# Altium PCB KORUZA_PowerModule_v2.PcbDoc
Units mil, origin at the board's own origin, x right, y up, seen from the top; angles counter-clockwise.
Board outline 2025 x 2630 mil, 2 copper layers (Top Layer, Bottom Layer); 13 components, 5 nets, 62 pads, 0 vias.
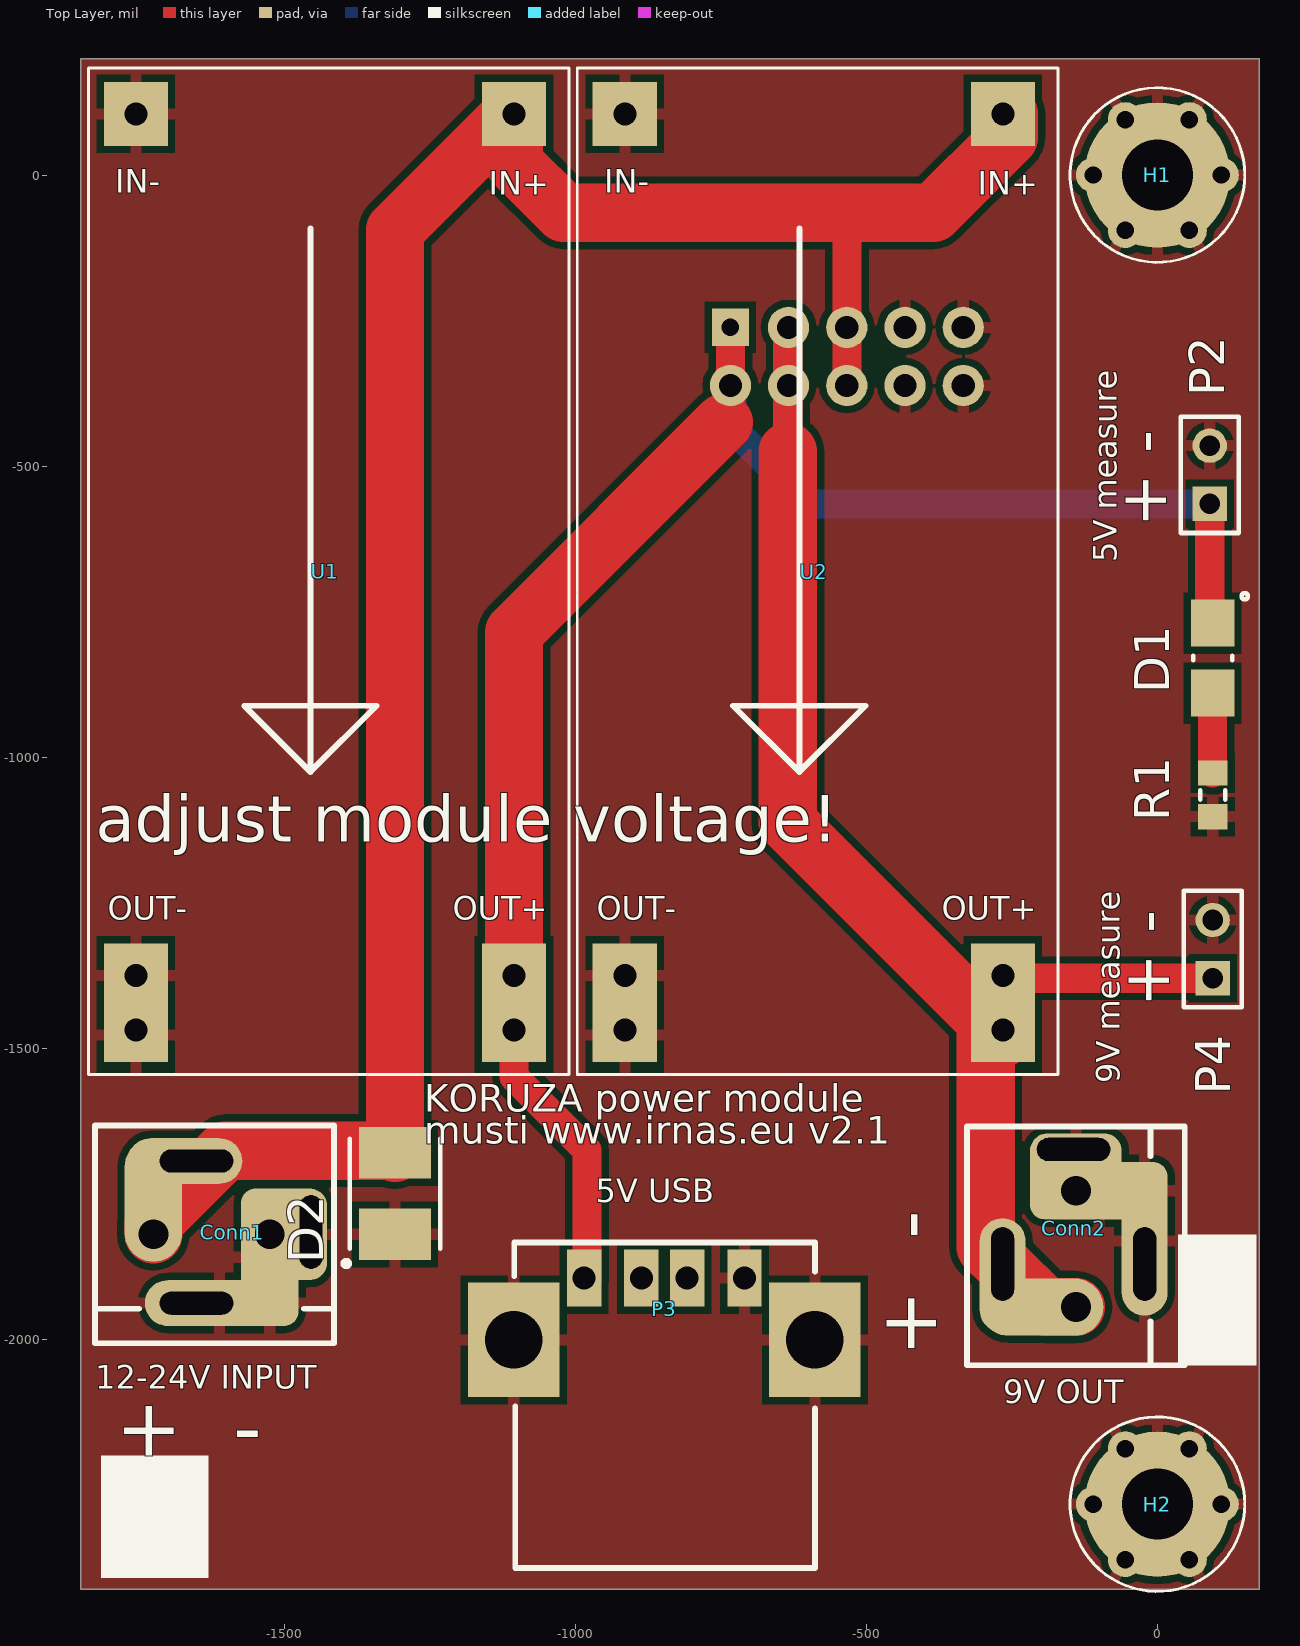
[diagram p0: Top Layer view]
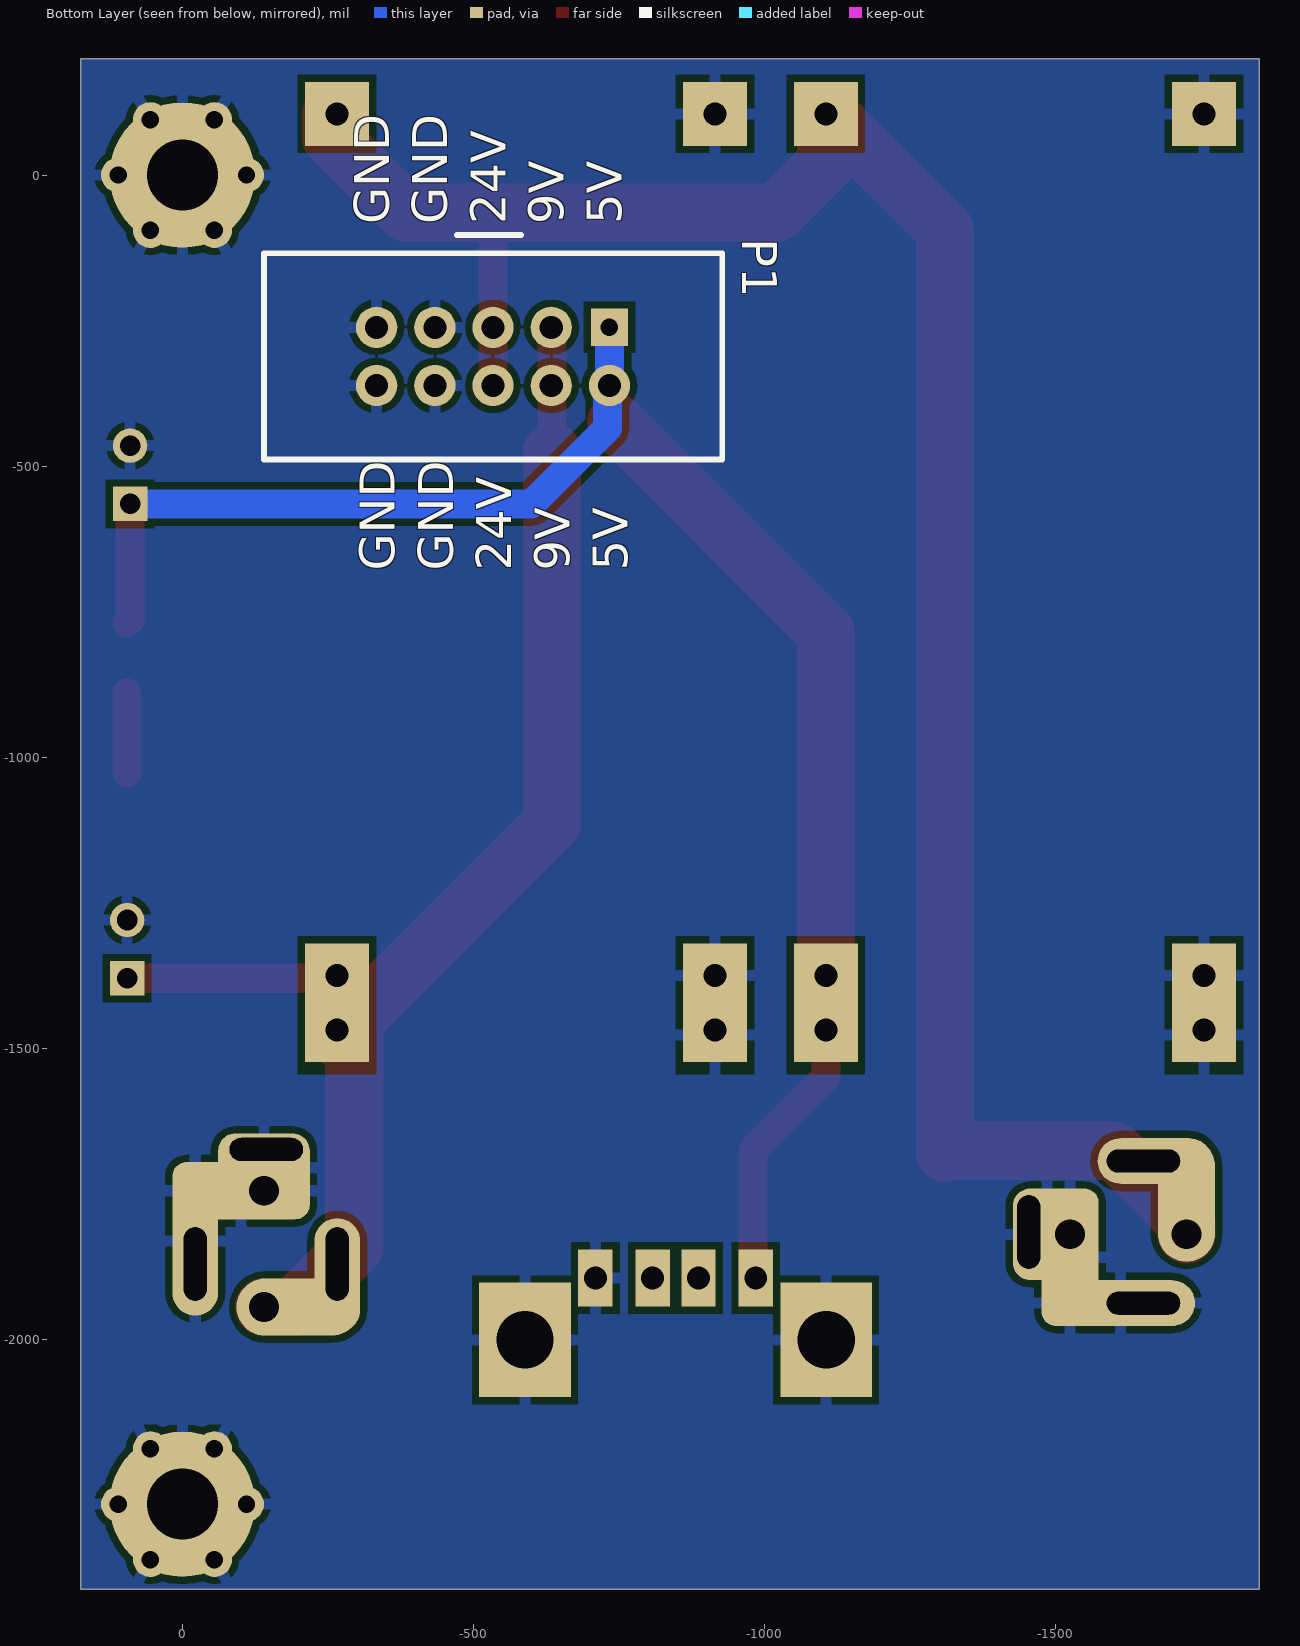
[diagram p1: Bottom Layer view, seen from below]

## Layer stack, top to bottom
Top Solder: solder mask 0.4, Solder Resist, Dk 3.5
Top Layer: signal copper 1.4
Dielectric 1: dielectric 12.6, FR-4, Dk 4.8
Bottom Layer: signal copper 1.4
Bottom Solder: solder mask 0.4, Solder Resist, Dk 3.5

## Board outline
175,200 -1850,200 -1850,-2430 175,-2430

## Design rules (kind name [scope] priority, off if disabled: settings)
Clearance [All] p1: gap=12
ComponentClearance [All] p1 off: gap=10 collisioncheckmode=3 verticalgap=0 showdistances=FALSE
PlaneConnect [All] p1: planeconnectstyle=Relief reliefexpansion=20 reliefentries=4 reliefconductorwidth=30 reliefairgap=10
PolygonConnect [All] p1: connectstyle=Relief reliefconductorwidth=20 reliefentries=4 polygonreliefangle="90 Angle" airgapwidth=12
RoutingVias [All] p1: holewidth=28 width=50 viastyle="Through Hole" minholewidth=28 minwidth=50 maxholewidth=28 maxwidth=50
SolderMaskExpansion [All] p1: expansion=4
UnpouredPolygon [All] p1: allowunpoured=FALSE
Width [All] p1: maxlimit=100 minlimit=30 preferedwidth=50
27 further rules are at their usual default settings.

## Components (designator, comment, footprint, x,y, rotation, side; value= is the part's Value field where it differs from the comment)
Conn1 "PowerScrewTerminal" "MKDSN 2,5/ 2-5,08 and powercon" -1525,-1820 r270 top
Conn2 "PowerScrewTerminal" "MKDSN 2,5/ 2-5,08 and powercon" -140,-1745 r0 top
D1 "LED" "1206/0805 diode" 95,-830 r270 top
D2 "TVS diode" DIOM4750X18N -1310,-1750 r90 top
H1 "M" MOUNTING 0,0 r0 top
H2 "M" MOUNTING 0,-2283.47 r0 top
P1 "IDC10" IDC10 -533.62,-311.73 r270 bottom
P2 "Header 2" HDR1X2 90,-565 r90 top
P3 "USB" "USB A THT" -985,-1895 r0 top
P4 "Header 2" HDR1X2 95,-1380 r90 top
R1 "1k" RESC2012X06N 95,-1065 r90 top
U1 "LM2596 module" "LM2596 module" -1755,105 r0 top
U2 "LM2596 module" "LM2596 module" -915,105 r0 top

## Footprints (in the part's own frame and the unit in brackets; to place one, negate y for a bottom-side part, rotate by r counter-clockwise, add the part's x,y. Pads: shape width x height; smd on the part's side, far side on the other; paste and mask are expansions set on the pad)
"1206/0805 diode" [mm] "Chip Diode, 2-Leads, Body 3,50x1,60mm, IPC Low Density"
  rect 2.05x1.9 smd: 1(-1.525,0) 2(1.525,0)
  silkscreen extent -2.84,-0.85 0.1,1.54, body extent -2,-0.9 2,0.9, height 3
DIOM4750X18N [mm] "Molded Diode, 2-Leads, Body 4.70x5.00mm, IPC Medium Density"
  rect 2.25x3.15 smd: 1(-1.775,0) 2(1.775,0)
  silkscreen extent -3.17,-1.97 2.4,2.25, body extent -2.4,-1.85 2.4,1.97, height 1.8
HDR1X2 [mm] "Connector; Header; 2 Position"
  rect 1.5x1.5 hole 0.9: 1(0,0)
  round 1.5 hole 0.9: 2(2.54,0)
  silkscreen extent -1.27,-1.27 3.81,1.27
IDC10 [mm] "2.54mm header 2x5"
  rect 1.624x1.624 hole 0.762: 1(-1.27,5.08)
  round 1.8 hole 1.01: 2(1.27,5.08) 3(-1.27,2.54) 4(1.27,2.54) 5(-1.27,0) 6(1.27,0) 7(-1.27,-2.54) 8(1.27,-2.54) 9(-1.27,-5.08) 10(1.27,-5.08)
  silkscreen extent -5.3,-10 4.5,10
"LM2596 module" [mm] "ebay LM2596 module"
  rect 2.8x2.8 hole 1: 1(0,0) 2(16.5,0) 3(16.5,-39.975) 3(16.5,-37.6) 4(0,-39.975) 4(0,-37.6)
  silkscreen extent -2.07,-41.93 18.9,2, body extent -2.15,-41.5 18.85,2, height 15.41
"MKDSN 2,5/ 2-5,08 and powercon" [mm] "combined footprint"
  rrect50% 4x3 hole 1 slot 3.2 at 0 deg copper offset 0.1,-0.8: 1(-0.1,1.8)
  rrect50% 6x2.5 hole 1.3 copper offset 1,0: 1(0,0)
  oval 2x6.5 hole 1 slot 3.2 at 90 deg copper offset 0,1: 1(3,-3.2)
  oval 2x5 hole 1 slot 3.2 at 90 deg copper offset 0,-0.5: 2(-3.2,-3.2)
  oval 5.4x2.5 hole 1.3 copper offset -1.5,0: 2(0,-5.08)
  silkscreen extent -4.75,-7.62 4.75,2.8, body extent -4.88,-7.75 10.5,2.67, height 15
MOUNTING [mil]
  round 250 hole 122.05: 1(0,0)
  round 60 hole 30: 2(-55,95.26) 3(55,95.26) 4(110,0) 5(55,-95.26) 6(-55,-95.26) 7(-110,0)
  silkscreen extent -150,-150 150,150
RESC2012X06N [mm] "Chip Resistor, 2-Leads, Body 2.0x1.2mm, IPC Medium Density"
  rect 1.1x1.3 smd: 1(-0.95,0) 2(0.95,0)
  silkscreen extent -0.2,-0.55 0.2,0.55, body extent -1.08,-0.62 1.07,0.63, height 0.6
"USB A THT" [mm]
  rect 1.5x2.5 hole 1: 1(0,0) 2(2.5,0) 3(4.5,0) 4(7,0)
  rect 4x5 hole 2.5: 5(-3.07,-2.7) 5(10.07,-2.7)
  silkscreen extent -3.05,-12.65 10.07,1.55, body extent -3.67,-12.8 10.93,1.43, height 8.03

## Part data
D1: "LED diode"
D2: "TVS bidirectional diode"
H1 H2: library part MOUNTING, "MOUNTING HOLE - NON INSTALLABLE"
P1: "IDC 10pin"
P2 P4: "Header, 2-Pin"
P3: "USB A standard receptacle"
R1: library part Resistor, "Resistor 0805 smd"

## Nets (pads, with @x,y where several pads share a name; then routed paths per layer and width w, separated by ;. In a path a pad name is that pad's centre, name@x,y a point inside that pad or via, vN(x,y) a via of type N, cw(c..) or ccw(c..) an arc to the next point about the centre after c; other vN are vias at no path point)
GND: Conn1.1 Conn2.1 D2.1 H1.1 H1.2 H1.3 H1.4 H1.5 H1.6 H1.7 H2.1 H2.2 H2.3 H2.4 H2.5 H2.6 H2.7 P1.7 P1.8 P1.9 P1.10 P2.2 P3.4 P3.5 P4.2 R1.1 U1.1 U1.4 U2.1 U2.4
NetD1_2: D1.2 R1.2 | length 137.6
  Top Layer w50: R1.2 D1.2
PSU_5V: D1.1 P1.1 P1.2 P2.1 P3.1 U1.3 | length 3099.8
  Top Layer w50: U1.3@-1105.39,-1477.68 -1105.39,-1549.61 -980,-1675 P3.1@-980,-1900 ; -745,-425 -733.62,-413.62 P1.2 P1.1 ; P2.1 90,-764.96 D1.1
  Top Layer w100: U1.3@-1105.39,-1477.68 -1105.39,-1375.32 -1105.39,-785.39 -745,-425
  Bottom Layer w50: P1.1 P1.2 -730,-365.35 -730,-435 -600,-565 P2.1
PSU_9V: Conn2.2 P1.3 P1.4 P4.1 U2.3 | length 2406.7
  Top Layer w50: -635,-475 -635,-263.11 P1.3 ; U2.3@-265.39,-1380.32 -265.08,-1380 P4.1
  Top Layer w100: -635,-475 -635,-1113.07 U2.3@-295,-1453.07 ; U2.3@-265.39,-1482.68 U2.3@-295,-1453.07 ; U2.3@-265.39,-1380.32 -295,-1409.92 U2.3@-295,-1453.07 ; Conn2.2@-140,-1945 -191.97,-1945 -265.98,-1870.98 -295,-1841.97 U2.3@-295,-1453.07
PSU_24V: Conn1.2 D2.2 P1.5 P1.6 U1.2 U2.2 | length 3730
  Top Layer w50: P1.6 P1.5 -533.62,-68.62 -530,-65
  Top Layer w100: Conn1.2@-1725,-1820 -1725,-1800 -1601.26,-1676.26 -1313.86,-1676.26 D2.2 -1310,-94.61 -1105.39,110 -1105.39,20.39 -1020,-65 -530,-65 -385,-65 -255.39,64.61 U2.2@-255.39,105
pads on no net: P3.2 P3.3

## Polygon pours and split planes (outlines as drawn)
GND on Top Layer "Top Layer-No Net" (solid, pour order 6): -1850,200 175,200 175,-2430 -1850,-2430
GND on Bottom Layer "Bot Layer-GND" (solid, pour order 5): -1850,200 175,200 175,-2430 -1850,-2430

## Silkscreen, mask and mechanical layers (free items; w line width, h text height)
Top Overlay:
  rectangle: 35,-2045 170,-1820
  rectangle: -1815,-2410 -1630,-2200
  text "+ -" at 15,-605 h80 r90
  text "5V measure" at -70,-665 h40 r90
  text "adjust module voltage!" at -1824.29,-1145.2 h80
  text "+ -" at 20,-1430 h80 r90
  text "9V measure" at -65,-1560 h40 r90
  text "KORUZA power module" at -1259.29,-1625.2 h80
  text "musti www.irnas.eu v2.1" at -1259.29,-1680.2 h80
  text "5V USB" at -965,-1765 h40
  text "+  -" at -380,-2030 h100 r90
  text "12-24V INPUT" at -1825,-2085 h40
  text "9V OUT" at -265,-2110 h40
  text "+  -" at -1790,-2200 h100
Bottom Overlay:
  text "5V" at -755,-85 h60 r270
  text "9V" at -655,-85 h60 r270
  text "24V" at -555,-85 h60 r270
  text "GND" at -455,-85 h60 r270
  text "GND" at -355,-85 h60 r270
  text "5V" at -765,-680 h60 r270
  text "9V" at -665,-680 h60 r270
  text "24V" at -565,-680 h60 r270
  text "GND" at -465,-680 h60 r270
  text "GND" at -365,-680 h60 r270
Mechanical 3:
  the board outline again, w10

## Text inside footprints (layer, text, board x,y; h text height)
U1: Top Overlay "OUT-" at -1803.23,-1279.84 h40; Top Overlay "OUT+" at -1210.71,-1279.84 h40; Top Overlay "IN+" at -1148.7,-33.78 h40; Top Overlay "IN-" at -1790.43,-30.83 h40
U2: Top Overlay "OUT-" at -963.23,-1279.84 h40; Top Overlay "OUT+" at -370.71,-1279.84 h40; Top Overlay "IN+" at -308.7,-33.78 h40; Top Overlay "IN-" at -950.43,-30.83 h40